# EAGLE board 20160708_DWC_LSM9DS1 (EAGLE 7.2.0)
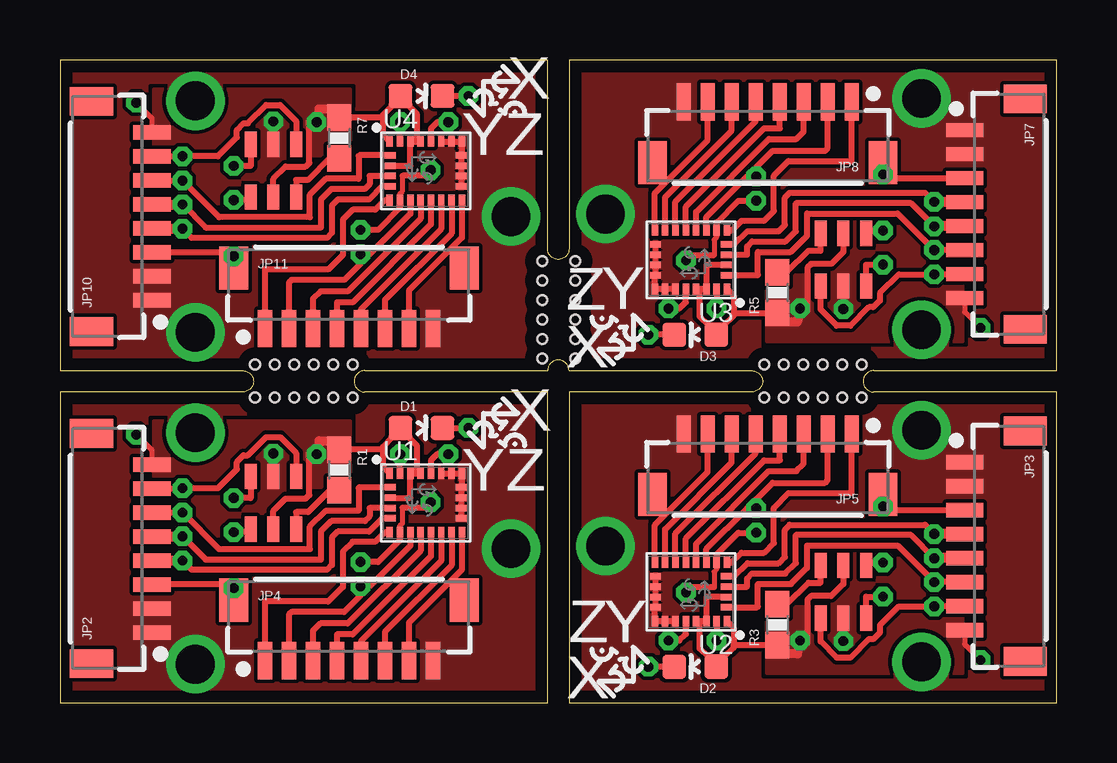
[diagram p0: board, top side]
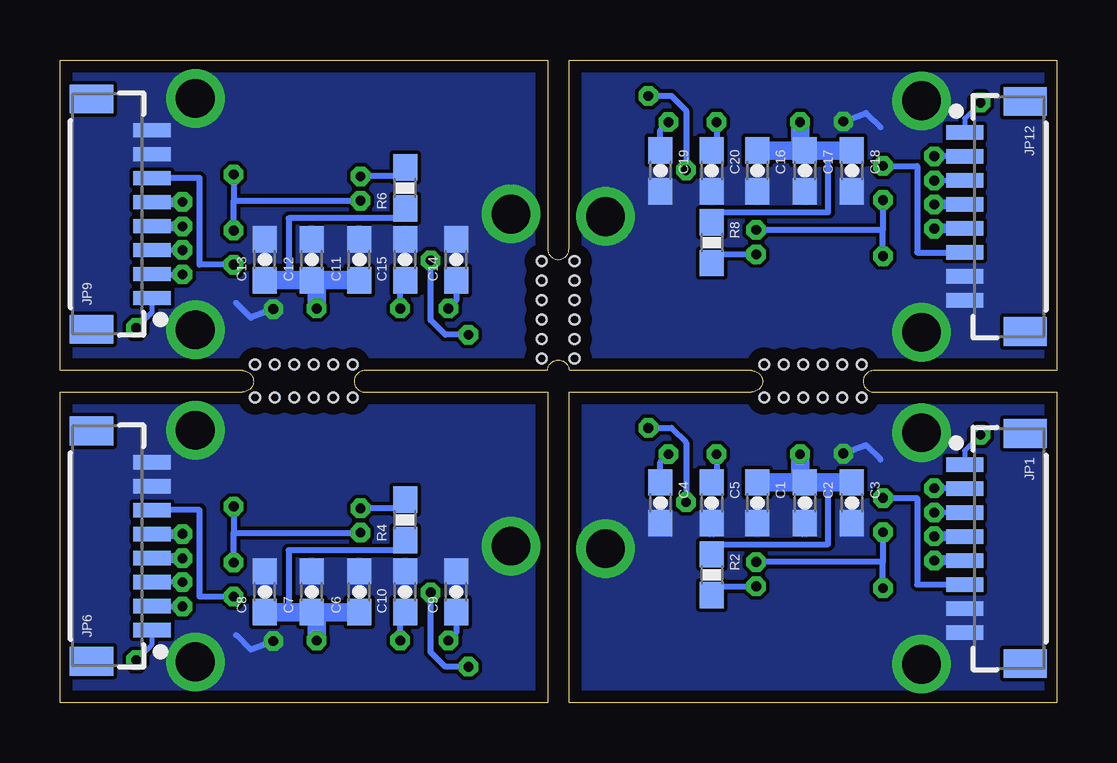
[diagram p1: board, bottom side, seen from below]

Size 41.53 x 26.8 mm. Coordinates in mm from the lower left corner, seen from the top.
Outline: 0,0 20.32,0 20.32,12.95 12.7,12.95 arc-180 12.7,13.84 20.32,13.84 arc-180 21.21,13.84 28.83,13.84 arc-180 28.83,12.95 21.21,12.95 21.21,0 41.53,0 41.53,12.95 33.91,12.95 arc-180 33.91,13.84 41.53,13.84 41.53,26.8 21.21,26.8 21.21,18.92 arc-180 20.32,18.92 20.32,26.8 0,26.8 0,13.84 7.62,13.84 arc-180 7.62,12.95 0,12.95 0,0
Copper layers (1*16): Top 0.0178mm / dielectric 59mil / Bottom 0.0178mm
Design rules "sunstone-2lyr_v1.0.0.3 *": minimum track width 6mil, minimum drill 14mil, track to track 6mil, track to pad 6mil, pad to pad 6mil, via to via 6mil, smd to smd 6mil, copper to edge 20mil, drill to drill 16mil, minimum pad ring 8mil, minimum via ring 8mil, stop-mask expansion 3mil, vias tented up to drill 0mil, thermal gap 0mil
Holes 0.41 mm at 8.13,12.73 8.94,12.73 9.75,12.73 10.57,12.73 11.38,12.73 12.19,12.73 8.13,14.1 8.94,14.1 9.75,14.1 10.57,14.1 11.38,14.1 12.19,14.1 29.34,12.73 30.15,12.73 30.96,12.73 31.78,12.73 32.59,12.73 33.4,12.73 29.34,14.1 30.15,14.1 30.96,14.1 31.78,14.1 32.59,14.1 33.4,14.1 20.09,18.41 20.09,17.6 20.09,16.79 20.09,15.98 20.09,15.16 20.09,14.35 21.46,18.41 21.46,17.6 21.46,16.79 21.46,15.98 21.46,15.16 21.46,14.35

## Footprints (pad centres in the part's own frame; a part is rotated, then mirrored left to right if it is on the bottom)
0603-CAP = smd 1.1 x 1: 1 -0.85,0; 2 0.85,0
LED-0603 = smd 1 x 1: A 0,-0.877; C 0,0.877
BM08B-SRSS-TB = smd 0.6 x 1.55: 1 -3.5,0; 2 -2.5,0; 3 -1.5,0; 4 -0.5,0; 5 0.5,0; 6 1.5,0; 7 2.5,0; 8 3.5,0 | smd 1.2 x 1.8: P$9 4.8,2.525; P$10 -4.8,2.525
0603-RES = smd 1.1 x 1: 1 -0.85,0; 2 0.85,0
SN74LVC1G175 = smd 0.5 x 1.05: P1 -0.95,-1.1; P2 0,-1.1; P3 0.95,-1.1; P4 0.95,1.1; P5 0,1.1; P6 -0.95,1.1
LGA24-8X4 = smd 0.27 x 0.45: 1 -1.505,1.225; 6 -1.505,-1.225; 7 -1.075,-1.225; 8 -0.645,-1.225; 9 -0.215,-1.225; 10 0.215,-1.225; 11 0.645,-1.225; 12 1.075,-1.225; 13 1.505,-1.225; 18 1.505,1.225; 19 1.075,1.225; 20 0.645,1.225; 21 0.215,1.225; 22 -0.215,1.225; 23 -0.645,1.225; 24 -1.075,1.225 | smd 0.45 x 0.27: 2 -1.475,0.645; 3 -1.475,0.215; 4 -1.475,-0.215; 5 -1.475,-0.645; 14 1.475,-0.645; 15 1.475,-0.215; 16 1.475,0.215; 17 1.475,0.645

## Placement (x,y rotation side)
C1  0.1uF  [0603-CAP]  12.47,8.33 270 bottom
C2  0.1uF  [0603-CAP]  10.49,8.33 270 bottom
C3  10uF  [0603-CAP]  8.53,8.33 270 bottom
C4  10nF  [0603-CAP]  16.51,8.33 270 bottom
C5  0.1uF  [0603-CAP]  14.38,8.33 270 bottom
C6  0.1uF  [0603-CAP]  29.06,4.62 90 bottom
C7  0.1uF  [0603-CAP]  31.04,4.62 90 bottom
C8  10uF  [0603-CAP]  32.99,4.62 90 bottom
C9  10nF  [0603-CAP]  25.02,4.62 90 bottom
C10  0.1uF  [0603-CAP]  27.15,4.62 90 bottom
C11  0.1uF  [0603-CAP]  29.06,18.47 90 bottom
C12  0.1uF  [0603-CAP]  31.04,18.47 90 bottom
C13  10uF  [0603-CAP]  32.99,18.47 90 bottom
C14  10nF  [0603-CAP]  25.02,18.47 90 bottom
C15  0.1uF  [0603-CAP]  27.15,18.47 90 bottom
C16  0.1uF  [0603-CAP]  12.47,22.17 270 bottom
C17  0.1uF  [0603-CAP]  10.49,22.17 270 bottom
C18  10uF  [0603-CAP]  8.53,22.17 270 bottom
C19  10nF  [0603-CAP]  16.51,22.17 270 bottom
C20  0.1uF  [0603-CAP]  14.38,22.17 270 bottom
D1  BLUE  [LED-0603]  15.06,11.46 270 top
D2  BLUE  [LED-0603]  26.47,1.5 90 top
D3  BLUE  [LED-0603]  26.47,15.34 90 top
D4  BLUE  [LED-0603]  15.06,25.3 270 top
JP1  [BM08B-SRSS-TB]  3.84,6.43 270 bottom
JP2  [BM08B-SRSS-TB]  3.84,6.43 90 top
JP3  [BM08B-SRSS-TB]  37.69,6.53 270 top
JP4  [BM08B-SRSS-TB]  12.04,1.75 0 top
JP5  [BM08B-SRSS-TB]  29.49,11.2 180 top
JP6  [BM08B-SRSS-TB]  37.69,6.53 90 bottom
JP7  [BM08B-SRSS-TB]  37.69,20.37 270 top
JP8  [BM08B-SRSS-TB]  29.49,25.04 180 top
JP9  [BM08B-SRSS-TB]  37.69,20.37 90 bottom
JP10  [BM08B-SRSS-TB]  3.84,20.27 90 top
JP11  [BM08B-SRSS-TB]  12.04,15.6 0 top
JP12  [BM08B-SRSS-TB]  3.84,20.27 270 bottom
R1  [0603-RES]  11.63,9.7 270 top
R2  [0603-RES]  14.38,5.33 270 bottom
R3  [0603-RES]  29.9,3.25 90 top
R4  [0603-RES]  27.15,7.62 90 bottom
R5  [0603-RES]  29.9,17.09 90 top
R6  [0603-RES]  27.15,21.46 90 bottom
R7  [0603-RES]  11.63,23.55 270 top
R8  [0603-RES]  14.38,19.18 270 bottom
T1  SN74LVC1G175  [SN74LVC1G175]  8.89,8.33 180 top
T2  SN74LVC1G175  [SN74LVC1G175]  32.64,4.62 0 top
T3  SN74LVC1G175  [SN74LVC1G175]  32.64,18.47 0 top
T4  SN74LVC1G175  [SN74LVC1G175]  8.89,22.17 180 top
U1  LSM9DS1  [LGA24-8X4]  15.24,8.33 0 top
U2  LSM9DS1  [LGA24-8X4]  26.29,4.62 180 top
U3  LSM9DS1  [LGA24-8X4]  26.29,18.47 180 top
U4  LSM9DS1  [LGA24-8X4]  15.24,22.17 0 top

## Library data of the parts
C1-C20 R1-R8 = SparkFun-Passives
D1-D4 = SparkFun-LED; PROD_ID: DIO-08575
JP1-JP12 = SparkFun-Connectors
T1-T4 = CSL_Components
U1-U4 = SparkFun-Sensors; PROD_ID: IC-12536

## Nets
CS_A/G: D1.C JP2.3 T1.P4 U1.7
CS_A/G1: D2.C JP3.3 T2.P4 U2.7
CS_A/G2: D3.C JP7.3 T3.P4 U3.7
CS_A/G3: D4.C JP10.3 T4.P4 U4.7
CS_M: JP4.2 R2.2 U1.8
CS_M1: JP5.2 R4.2 U2.8
CS_M2: JP8.2 R6.2 U3.8
CS_M3: JP11.2 R8.2 U4.8
CSCLK: JP1.2 JP2.7 T1.P1
CSCLK1: JP3.7 JP6.2 T2.P1
CSCLK2: JP7.7 JP9.2 T3.P1
CSCLK3: JP10.7 JP12.2 T4.P1
D: JP1.6 T1.P3
D1: JP6.6 T2.P3
D2: JP9.6 T3.P3
D3: JP12.6 T4.P3
DEN_A/G: JP4.7 U1.13
DEN_A/G1: JP5.7 U2.13
DEN_A/G2: JP8.7 U3.13
DEN_A/G3: JP11.7 U4.13
DRDY_M: JP4.3 U1.9
DRDY_M1: JP5.3 U2.9
DRDY_M2: JP8.3 U3.9
DRDY_M3: JP11.3 U4.9
GND: C1.2 C2.2 C3.2 C4.2 C5.2 JP1.7 JP1.8 JP2.1 JP2.2 JP4.8 T1.P2 U1.14 U1.15 U1.16 U1.17 U1.18 U1.19 U1.20
GND1: C6.2 C7.2 C8.2 C9.2 C10.2 JP3.1 JP3.2 JP5.8 JP6.7 JP6.8 T2.P2 U2.14 U2.15 U2.16 U2.17 U2.18 U2.19 U2.20
GND2: C11.2 C12.2 C13.2 C14.2 C15.2 JP7.1 JP7.2 JP8.8 JP9.7 JP9.8 T3.P2 U3.14 U3.15 U3.16 U3.17 U3.18 U3.19 U3.20
GND3: C16.2 C17.2 C18.2 C19.2 C20.2 JP10.1 JP10.2 JP11.8 JP12.7 JP12.8 T4.P2 U4.14 U4.15 U4.16 U4.17 U4.18 U4.19 U4.20
INT1_A/G: JP4.5 U1.11
INT1_A/G1: JP5.5 U2.11
INT1_A/G2: JP8.5 U3.11
INT1_A/G3: JP11.5 U4.11
INT2_A/G: JP4.6 U1.12
INT2_A/G1: JP5.6 U2.12
INT2_A/G2: JP8.6 U3.12
INT2_A/G3: JP11.6 U4.12
INT_M: JP4.4 U1.10
INT_M1: JP5.4 U2.10
INT_M2: JP8.4 U3.10
INT_M3: JP11.4 U4.10
N$1: R1.2 T1.P6
N$2: C4.1 U1.21
N$3: C5.1 U1.24
N$4: C9.1 U2.21
N$5: C10.1 U2.24
N$6: R3.2 T2.P6
N$7: C14.1 U3.21
N$8: C15.1 U3.24
N$9: R5.2 T3.P6
N$10: C19.1 U4.21
N$11: C20.1 U4.24
N$12: R7.2 T4.P6
SCL: JP1.3 JP2.6 U1.2
SCL1: JP3.6 JP6.3 U2.2
SCL2: JP7.6 JP9.3 U3.2
SCL3: JP10.6 JP12.3 U4.2
SDA: JP1.4 JP2.5 U1.4
SDA1: JP3.5 JP6.4 U2.4
SDA2: JP7.5 JP9.4 U3.4
SDA3: JP10.5 JP12.4 U4.4
SDO_A/G: JP1.5 JP2.4 U1.5
SDO_A/G1: JP3.4 JP6.5 U2.5
SDO_A/G2: JP7.4 JP9.5 U3.5
SDO_A/G3: JP10.4 JP12.5 U4.5
SDO_M: JP4.1 U1.6
SDO_M1: JP5.1 U2.6
SDO_M2: JP8.1 U3.6
SDO_M3: JP11.1 U4.6
VDD: C1.1 C2.1 C3.1 D1.A JP1.1 JP2.8 R1.1 R2.1 T1.P5 U1.1 U1.3 U1.22 U1.23
VDD1: C6.1 C7.1 C8.1 D2.A JP3.8 JP6.1 R3.1 R4.1 T2.P5 U2.1 U2.3 U2.22 U2.23
VDD2: C11.1 C12.1 C13.1 D3.A JP7.8 JP9.1 R5.1 R6.1 T3.P5 U3.1 U3.3 U3.22 U3.23
VDD3: C16.1 C17.1 C18.1 D4.A JP10.8 JP12.1 R7.1 R8.1 T4.P5 U4.1 U4.3 U4.22 U4.23

## Tracks (layer width: path | path; a pad name or v marks a point on that pad's centre or on a via)
CS_A/G  (via drill 0.41)
  Top 0.203: U1.7 14.16,7.38 14.28,7.49 14.28,8.13
  Top 0.254: 3.86,4.9 JP2.3 7.09,4.93 v7.24,4.78 | U1.7 14.16,6.77 13.26,5.87 v12.52,5.87 | T1.P4 7.96,7.11 v7.24,7.11 | D1.C v17.02,11.46 | v15.44,8.36 15.21,8.13 14.28,8.13
  Bottom 0.254: v7.24,4.78 7.24,5.87 | 7.24,5.87 v12.52,5.87 | v7.24,7.11 7.24,5.87 | v17.02,11.46 16.05,11.46 15.44,10.85 v15.44,8.36
CS_A/G1  (via drill 0.41)
  Top 0.203: U2.7 27.36,5.57 27.25,5.46 27.25,4.83
  Top 0.254: 37.67,8.05 JP3.3 34.44,8.03 v34.29,8.18 | U2.7 27.36,6.18 28.27,7.09 v29.01,7.09 | T2.P4 33.57,5.84 v34.29,5.84 | D2.C v24.51,1.5 | v26.09,4.6 26.31,4.83 27.25,4.83
  Bottom 0.254: v34.29,8.18 34.29,7.09 | 34.29,7.09 v29.01,7.09 | v34.29,5.84 34.29,7.09 | v24.51,1.5 25.48,1.5 26.09,2.11 v26.09,4.6
CS_A/G2  (via drill 0.41)
  Top 0.203: U3.7 27.36,19.41 27.25,19.3 27.25,18.67
  Top 0.254: 37.67,21.89 JP7.3 34.44,21.87 v34.29,22.02 | U3.7 27.36,20.02 28.27,20.93 v29.01,20.93 | T3.P4 33.57,19.68 v34.29,19.68 | D3.C v24.51,15.34 | v26.09,18.44 26.31,18.67 27.25,18.67
  Bottom 0.254: v34.29,22.02 34.29,20.93 | 34.29,20.93 v29.01,20.93 | v34.29,19.68 34.29,20.93 | v24.51,15.34 25.48,15.34 26.09,15.95 v26.09,18.44
CS_A/G3  (via drill 0.41)
  Top 0.203: U4.7 14.16,21.23 14.28,21.34 14.28,21.97
  Top 0.254: 3.86,18.75 JP10.3 7.09,18.77 v7.24,18.62 | U4.7 14.16,20.62 13.26,19.71 v12.52,19.71 | T4.P4 7.96,20.95 v7.24,20.95 | D4.C v17.02,25.3 | v15.44,22.2 15.21,21.97 14.28,21.97
  Bottom 0.254: v7.24,18.62 7.24,19.71 | 7.24,19.71 v12.52,19.71 | v7.24,20.95 7.24,19.71 | v17.02,25.3 16.05,25.3 15.44,24.69 v15.44,22.2
CS_M  (via drill 0.41)
  Top 0.254: U1.8 14.6,6.54 12.9,4.85 v12.52,4.85 12.52,4.47 11.84,3.79 9.65,3.79 9.54,3.67 JP4.2
  Bottom 0.254: R2.2 14.01,4.85 v12.52,4.85
CS_M1  (via drill 0.41)
  Top 0.254: U2.8 26.93,6.41 28.63,8.1 v29.01,8.1 29.01,8.48 29.69,9.17 31.88,9.17 31.99,9.28 JP5.2
  Bottom 0.254: R4.2 27.52,8.1 v29.01,8.1
CS_M2  (via drill 0.41)
  Top 0.254: U3.8 26.93,20.25 28.63,21.95 v29.01,21.95 29.01,22.33 29.69,23.01 31.88,23.01 31.99,23.12 JP8.2
  Bottom 0.254: R6.2 27.52,21.95 v29.01,21.95
CS_M3  (via drill 0.41)
  Top 0.254: U4.8 14.6,20.39 12.9,18.69 v12.52,18.69 12.52,18.31 11.84,17.63 9.65,17.63 9.54,17.52 JP11.2
  Bottom 0.254: R8.2 14.01,18.69 v12.52,18.69
CSCLK  (via drill 0.41)
  Top 0.254: T1.P1 9.84,10.4 9.17,11.07 8.59,11.07 7.82,10.31 7.64,10.31 7.37,10.03 7.37,9.73 6.58,8.94 5.13,8.94 v5.11,8.94 3.85,8.94 JP1.2
  Bottom 0.254: JP1.2 3.83,8.94 v5.11,8.94
CSCLK1  (via drill 0.41)
  Top 0.254: T2.P1 31.69,2.55 32.36,1.88 32.94,1.88 33.71,2.64 33.88,2.64 34.16,2.92 34.16,3.23 34.95,4.01 36.4,4.01 v36.42,4.01 37.68,4.01 JP6.2
  Bottom 0.254: JP6.2 37.69,4.01 v36.42,4.01
CSCLK2  (via drill 0.41)
  Top 0.254: T3.P1 31.69,16.39 32.36,15.72 32.94,15.72 33.71,16.48 33.88,16.48 34.16,16.76 34.16,17.07 34.95,17.86 36.4,17.86 v36.42,17.86 37.68,17.86 JP9.2
  Bottom 0.254: JP9.2 37.69,17.86 v36.42,17.86
CSCLK3  (via drill 0.41)
  Top 0.254: T4.P1 9.84,24.25 9.17,24.92 8.59,24.92 7.82,24.16 7.64,24.16 7.37,23.88 7.37,23.57 6.58,22.78 5.13,22.78 v5.11,22.78 3.85,22.78 JP12.2
  Bottom 0.254: JP12.2 3.83,22.78 v5.11,22.78
D  (via drill 0.41 pad 0.41)
  Top 0.254: T1.P3 7.94,8.53 v7.24,8.53
  Bottom 0.254: JP1.6 5.82,4.93 5.82,8.53 v7.24,8.53
D1  (via drill 0.41 pad 0.41)
  Top 0.254: T2.P3 33.59,4.42 v34.29,4.42
  Bottom 0.254: JP6.6 35.71,8.03 35.71,4.42 v34.29,4.42
D2  (via drill 0.41 pad 0.41)
  Top 0.254: T3.P3 33.59,18.26 v34.29,18.26
  Bottom 0.254: JP9.6 35.71,21.87 35.71,18.26 v34.29,18.26
D3  (via drill 0.41 pad 0.41)
  Top 0.254: T4.P3 7.94,22.38 v7.24,22.38
  Bottom 0.254: JP12.6 5.82,18.77 5.82,22.38 v7.24,22.38
DEN_A/G
  Top 0.254: U1.13 16.75,5.54 14.54,3.34 JP4.7
DEN_A/G1
  Top 0.254: U2.13 24.78,7.41 26.99,9.62 JP5.7
DEN_A/G2
  Top 0.254: U3.13 24.78,21.25 26.99,23.46 JP8.7
DEN_A/G3
  Top 0.254: U4.13 16.75,19.39 14.54,17.18 JP11.7
DRDY_M
  Top 0.254: U1.9 15.03,6.34 11.99,3.3 10.85,3.3 10.54,3 JP4.3
DRDY_M1
  Top 0.254: U2.9 26.5,6.62 29.54,9.65 30.68,9.65 30.99,9.96 JP5.3
DRDY_M2
  Top 0.254: U3.9 26.5,20.46 29.54,23.5 30.68,23.5 30.99,23.8 JP8.3
DRDY_M3
  Top 0.254: U4.9 15.03,20.18 11.99,17.14 10.85,17.14 10.54,16.84 JP11.3
GND  (via drill 0.41, 1.61 pad 2.44)
  Top 0.254: U1.20 U1.19 U1.18 16.75,9.01 U1.17 U1.16 U1.15 U1.14 | T1.P2 v8.89,10.39 8.89,10.46
  Bottom 0.254: v8.89,10.39 7.95,10.74 7.34,10.13
  other vias: 5.64,1.6 5.64,11.25 18.8,6.43
  pour Bottom: -0.48,13.21 20.78,13.21 20.78,-0.51 -0.48,-0.51
  pour Top (rank 2): -0.79,13.69 20.73,13.69 20.73,-0.61 -0.79,-0.61
GND1  (via drill 0.41, 1.61 pad 2.44)
  Top 0.254: U2.20 U2.19 U2.18 24.78,3.95 U2.17 U2.16 U2.15 U2.14 | T2.P2 v32.64,2.56 32.64,2.49
  Bottom 0.254: v32.64,2.56 33.58,2.21 34.19,2.82
  other vias: 35.89,11.35 35.89,1.7 22.73,6.53
  pour Bottom: 42.01,-0.25 20.75,-0.25 20.75,13.46 42.01,13.46
  pour Top (rank 2): 42.32,-0.74 20.8,-0.74 20.8,13.56 42.32,13.56
GND2  (via drill 0.41, 1.61 pad 2.44)
  Top 0.254: U3.20 U3.19 U3.18 24.78,17.79 U3.17 U3.16 U3.15 U3.14 | T3.P2 v32.64,16.41 32.64,16.33
  Bottom 0.254: v32.64,16.41 33.58,16.05 34.19,16.66
  other vias: 35.89,25.2 35.89,15.54 22.73,20.37
  pour Bottom: 42.01,13.59 20.75,13.59 20.75,27.3 42.01,27.3
  pour Top (rank 2): 42.32,13.11 20.8,13.11 20.8,27.41 42.32,27.41
GND3  (via drill 0.41, 1.61 pad 2.44)
  Top 0.254: U4.20 U4.19 U4.18 16.75,22.85 U4.17 U4.16 U4.15 U4.14 | T4.P2 v8.89,24.23 8.89,24.31
  Bottom 0.254: v8.89,24.23 7.95,24.59 7.34,23.98
  other vias: 5.64,15.44 5.64,25.1 18.8,20.27
  pour Bottom: -0.48,27.05 20.78,27.05 20.78,13.34 -0.48,13.34
  pour Top (rank 2): -0.79,27.53 20.73,27.53 20.73,13.23 -0.79,13.23
INT1_A/G
  Top 0.254: U1.11 15.88,5.9 12.54,2.56 JP4.5
INT1_A/G1
  Top 0.254: U2.11 25.64,7.05 28.99,10.4 JP5.5
INT1_A/G2
  Top 0.254: U3.11 25.64,20.89 28.99,24.24 JP8.5
INT1_A/G3
  Top 0.254: U4.11 15.88,19.75 12.54,16.4 JP11.5
INT2_A/G
  Top 0.254: U1.12 16.32,5.72 13.54,2.95 JP4.6
INT2_A/G1
  Top 0.254: U2.12 25.21,7.23 27.99,10.01 JP5.6
INT2_A/G2
  Top 0.254: U3.12 25.21,21.07 27.99,23.85 JP8.6
INT2_A/G3
  Top 0.254: U4.12 16.32,19.57 13.54,16.79 JP11.6
INT_M
  Top 0.254: U1.10 15.46,6.11 12.19,2.85 11.53,2.85 11.54,2.84 JP4.4
INT_M1
  Top 0.254: U2.10 26.07,6.85 29.34,10.11 30,10.11 29.99,10.12 JP5.4
INT_M2
  Top 0.254: U3.10 26.07,20.69 29.34,23.95 30,23.95 29.99,23.96 JP8.4
INT_M3
  Top 0.254: U4.10 15.46,19.95 12.19,16.69 11.53,16.69 11.54,16.68 JP11.4
N$1
  Top 0.254: R1.2 11.24,8.85 10.34,7.95 9.84,7.95 T1.P6
N$2  (via drill 0.41)
  Top 0.254: 15.46,9.94 U1.21 15.46,10.1 15.72,10.36 v16.18,10.36
  Bottom 0.254: 16,10.36 v16.18,10.36 16.51,10.03 C4.1
N$3  (via drill 0.41)
  Top 0.254: U1.24 v14.16,10.36 v14.17,10.36
  Bottom 0.254: v14.17,10.36 14.17,9.18 C5.1
N$4  (via drill 0.41)
  Top 0.254: 26.07,3.01 U2.21 26.07,2.86 25.81,2.59 v25.35,2.59
  Bottom 0.254: 25.53,2.59 v25.35,2.59 25.02,2.92 C9.1
N$5  (via drill 0.41)
  Top 0.254: U2.24 v27.36,2.59
  Bottom 0.254: v27.36,2.59 27.36,3.77 C10.1
N$6
  Top 0.254: R3.2 30.29,4.1 31.19,5 31.69,5 T2.P6
N$7  (via drill 0.41)
  Top 0.254: 26.07,16.85 U3.21 26.07,16.7 25.81,16.43 v25.35,16.43
  Bottom 0.254: 25.53,16.43 v25.35,16.43 25.02,16.76 C14.1
N$8  (via drill 0.41)
  Top 0.254: U3.24 v27.36,16.43
  Bottom 0.254: v27.36,16.43 27.36,17.62 C15.1
N$9
  Top 0.254: R5.2 30.29,17.94 31.19,18.85 31.69,18.85 T3.P6
N$10  (via drill 0.41)
  Top 0.254: 15.46,23.79 U4.21 15.46,23.94 15.72,24.21 v16.18,24.21
  Bottom 0.254: 16,24.21 v16.18,24.21 16.51,23.88 C19.1
N$11  (via drill 0.41)
  Top 0.254: U4.24 v14.16,24.21 v14.17,24.21
  Bottom 0.254: v14.17,24.21 14.17,23.02 C20.1
N$12
  Top 0.254: R7.2 11.24,22.7 10.34,21.79 9.84,21.79 T4.P6
SCL  (via drill 0.41)
  Top 0.254: U1.2 12.47,8.98 12.45,8.95 12.45,8 11.07,8 10.41,7.34 10.41,6.4 6.63,6.4 v5.11,7.92 JP1.3
  Bottom 0.254: JP1.3 3.83,7.9 v5.11,7.92
SCL1  (via drill 0.41)
  Top 0.254: U2.2 29.06,3.98 29.08,4 29.08,4.95 30.45,4.95 31.11,5.61 31.11,6.55 34.9,6.55 v36.42,5.03 JP6.3
  Bottom 0.254: JP6.3 37.69,5.05 v36.42,5.03
SCL2  (via drill 0.41)
  Top 0.254: U3.2 29.06,17.82 29.08,17.85 29.08,18.8 30.45,18.8 31.11,19.46 31.11,20.4 34.9,20.4 v36.42,18.87 JP9.3
  Bottom 0.254: JP9.3 37.69,18.9 v36.42,18.87
SCL3  (via drill 0.41)
  Top 0.254: U4.2 12.47,22.82 12.45,22.79 12.45,21.84 11.07,21.84 10.41,21.18 10.41,20.24 6.63,20.24 v5.11,21.77 JP12.3
  Bottom 0.254: JP12.3 3.83,21.74 v5.11,21.77
SDA  (via drill 0.41)
  Top 0.254: U1.4 12.9,8.12 12.9,7.77 12.7,7.57 11.3,7.57 10.87,7.14 10.87,5.97 6.07,5.97 v5.11,6.93
  Top 0.406: JP1.4 v5.11,6.93
  Bottom 0.406: JP1.4 v5.11,6.93
SDA1  (via drill 0.41)
  Top 0.254: U2.4 28.63,4.84 28.63,5.18 28.83,5.38 30.23,5.38 30.66,5.82 30.66,6.99 35.46,6.99 v36.42,6.02
  Top 0.406: JP6.4 v36.42,6.03 v36.42,6.02
  Bottom 0.406: JP6.4 v36.42,6.03 v36.42,6.02
SDA2  (via drill 0.41)
  Top 0.254: U3.4 28.63,18.68 28.63,19.02 28.83,19.23 30.23,19.23 30.66,19.66 30.66,20.83 35.46,20.83 v36.42,19.86
  Top 0.406: JP9.4 v36.42,19.87 v36.42,19.86
  Bottom 0.406: JP9.4 v36.42,19.87 v36.42,19.86
SDA3  (via drill 0.41)
  Top 0.254: U4.4 12.9,21.96 12.9,21.61 12.7,21.41 11.3,21.41 10.87,20.98 10.87,19.81 6.07,19.81 v5.11,20.78
  Top 0.406: JP12.4 5.11,20.77 v5.11,20.78
  Bottom 0.406: JP12.4 5.11,20.77 v5.11,20.78
SDO_A/G  (via drill 0.41)
  Top 0.254: U1.5 13.43,7.69 12.88,7.14 11.58,7.14 11.33,6.88 11.33,5.74 11.12,5.54 5.49,5.54 v5.11,5.92
  Top 0.406: JP1.5 v5.11,5.93 v5.11,5.92
  Bottom 0.406: JP1.5 v5.11,5.93 v5.11,5.92
SDO_A/G1  (via drill 0.41)
  Top 0.254: U2.5 28.1,5.27 28.65,5.82 29.95,5.82 30.2,6.07 30.2,7.21 30.4,7.42 36.04,7.42 v36.42,7.04
  Top 0.406: JP6.5 36.42,7.03 v36.42,7.04
  Bottom 0.406: JP6.5 36.42,7.03 v36.42,7.04
SDO_A/G2  (via drill 0.41)
  Top 0.254: U3.5 28.1,19.11 28.65,19.66 29.95,19.66 30.2,19.91 30.2,21.06 30.4,21.26 36.04,21.26 v36.42,20.88
  Top 0.406: JP9.5 v36.42,20.87 v36.42,20.88
  Bottom 0.406: JP9.5 v36.42,20.87 v36.42,20.88
SDO_A/G3  (via drill 0.41)
  Top 0.254: U4.5 13.43,21.53 12.88,20.98 11.58,20.98 11.33,20.73 11.33,19.58 11.12,19.38 5.49,19.38 v5.11,19.76
  Top 0.406: JP12.5 v5.11,19.77 v5.11,19.76
  Bottom 0.406: JP12.5 v5.11,19.77 v5.11,19.76
SDO_M
  Top 0.254: U1.6 13.53,7.11 13.13,6.71 12.19,6.71 11.79,6.3 11.79,4.83 11.18,4.22 8.54,4.22 JP4.1
SDO_M1
  Top 0.254: U2.6 28,5.85 28.4,6.25 29.34,6.25 29.74,6.66 29.74,8.13 30.35,8.74 32.99,8.74 JP5.1
SDO_M2
  Top 0.254: U3.6 28,19.69 28.4,20.09 29.34,20.09 29.74,20.5 29.74,21.97 30.35,22.58 32.99,22.58 JP8.1
SDO_M3
  Top 0.254: U4.6 13.53,20.95 13.13,20.55 12.19,20.55 11.79,20.14 11.79,18.67 11.18,18.06 8.54,18.06 JP11.1
VDD  (via drill 0.41)
  Top 0.203: JP1.1 3.83,10.52 v3.17,11.18
  Top 0.254: U1.22 U1.23 | U1.3 14.6,8.55 U1.23 | U1.23 14.88,9.56 14.88,10.69 14.53,11.05 | 14.53,11.05 13.84,11.05 13.46,10.67 13.46,10.55 | U1.1 13.46,9.83 13.46,10.55 | T1.P5 8.89,8 9.4,8.51 10.24,8.51 10.39,8.66 10.39,10.46 v10.69,10.36 | 13.46,10.55 R1.1 | 14.53,11.05 14.19,11.39 D1.A
  Top 0.381: R1.1 11.58,10.92 10.79,10.92 10.82,10.9 v10.69,10.36
  Bottom 0.203: v3.17,11.18 3.83,10.52 JP1.1
  Bottom 0.254: 9.53,9.18 9.53,6.6 13.96,6.6 R2.1
  Bottom 0.762: C2.1 9.53,9.18 C3.1 | C2.1 C1.1 | C2.1 10.69,9.22 v10.69,10.36
  pour Top: 3.91,11.73 12.09,11.73 12.09,8.97 3.91,8.97
VDD1  (via drill 0.41)
  Top 0.203: JP6.1 37.69,2.44 v38.35,1.78
  Top 0.254: U2.22 U2.23 | U2.3 26.93,4.41 U2.23 | U2.23 26.64,3.4 26.64,2.26 27,1.91 | 27,1.91 27.69,1.91 28.07,2.29 28.07,2.4 | U2.1 28.07,3.12 28.07,2.4 | T2.P5 32.64,4.95 32.13,4.45 31.29,4.45 31.14,4.29 31.14,2.49 v30.84,2.59 | 28.07,2.4 R3.1 | 27,1.91 27.34,1.56 D2.A
  Top 0.381: R3.1 29.95,2.03 30.73,2.03 30.71,2.06 v30.84,2.59
  Bottom 0.203: v38.35,1.78 37.69,2.44 JP6.1
  Bottom 0.254: 32,3.77 32,6.35 27.57,6.35 R4.1
  Bottom 0.762: C7.1 32,3.77 C8.1 | C7.1 C6.1 | C7.1 30.84,3.73 v30.84,2.59
  pour Top: 37.62,1.22 29.44,1.22 29.44,3.99 37.62,3.99
VDD2  (via drill 0.41)
  Top 0.203: JP9.1 37.69,16.28 v38.35,15.62
  Top 0.254: U3.22 U3.23 | U3.3 26.93,18.25 U3.23 | U3.23 26.64,17.24 26.64,16.1 27,15.75 | 27,15.75 27.69,15.75 28.07,16.13 28.07,16.24 | U3.1 28.07,16.97 28.07,16.24 | T3.P5 32.64,18.8 32.13,18.29 31.29,18.29 31.14,18.14 31.14,16.33 v30.84,16.43 | 28.07,16.24 R5.1 | 27,15.75 27.34,15.4 D3.A
  Top 0.381: R5.1 29.95,15.88 30.73,15.88 30.71,15.9 v30.84,16.43
  Bottom 0.203: v38.35,15.62 37.69,16.28 JP9.1
  Bottom 0.254: 32,17.62 32,20.19 27.57,20.19 R6.1
  Bottom 0.762: C12.1 32,17.62 C13.1 | C12.1 C11.1 | C12.1 30.84,17.58 v30.84,16.43
  pour Top: 37.62,15.06 29.44,15.06 29.44,17.83 37.62,17.83
VDD3  (via drill 0.41)
  Top 0.203: JP12.1 3.83,24.36 v3.17,25.02
  Top 0.254: U4.22 U4.23 | U4.3 14.6,22.39 U4.23 | U4.23 14.88,23.4 14.88,24.54 14.53,24.89 | 14.53,24.89 13.84,24.89 13.46,24.51 13.46,24.4 | U4.1 13.46,23.67 13.46,24.4 | T4.P5 8.89,21.84 9.4,22.35 10.24,22.35 10.39,22.5 10.39,24.31 v10.69,24.21 | 13.46,24.4 R7.1 | 14.53,24.89 14.19,25.24 D4.A
  Top 0.381: R7.1 11.58,24.77 10.79,24.77 10.82,24.74 v10.69,24.21
  Bottom 0.203: v3.17,25.02 3.83,24.36 JP12.1
  Bottom 0.254: 9.53,23.02 9.53,20.45 13.96,20.45 R8.1
  Bottom 0.762: C17.1 9.53,23.02 C18.1 | C17.1 C16.1 | C17.1 10.69,23.06 v10.69,24.21
  pour Top: 3.91,25.58 12.09,25.58 12.09,22.81 3.91,22.81

## Text on the board
tPlace: X | Y | Z | Z | Y | X | X | Y | Z | Z | Y | X